# Altium PCB 3.PcbDoc (part 2 of 2)
Units mm, origin at the board's own origin, x right, y up, seen from the top; angles counter-clockwise.
Board outline 213.29 x 128.2 mm, 2 copper layers (Top Layer, Bottom Layer); 207 components, 133 nets, 588 pads, 301 vias.
Unrouted connection lines stored in the file: 3.
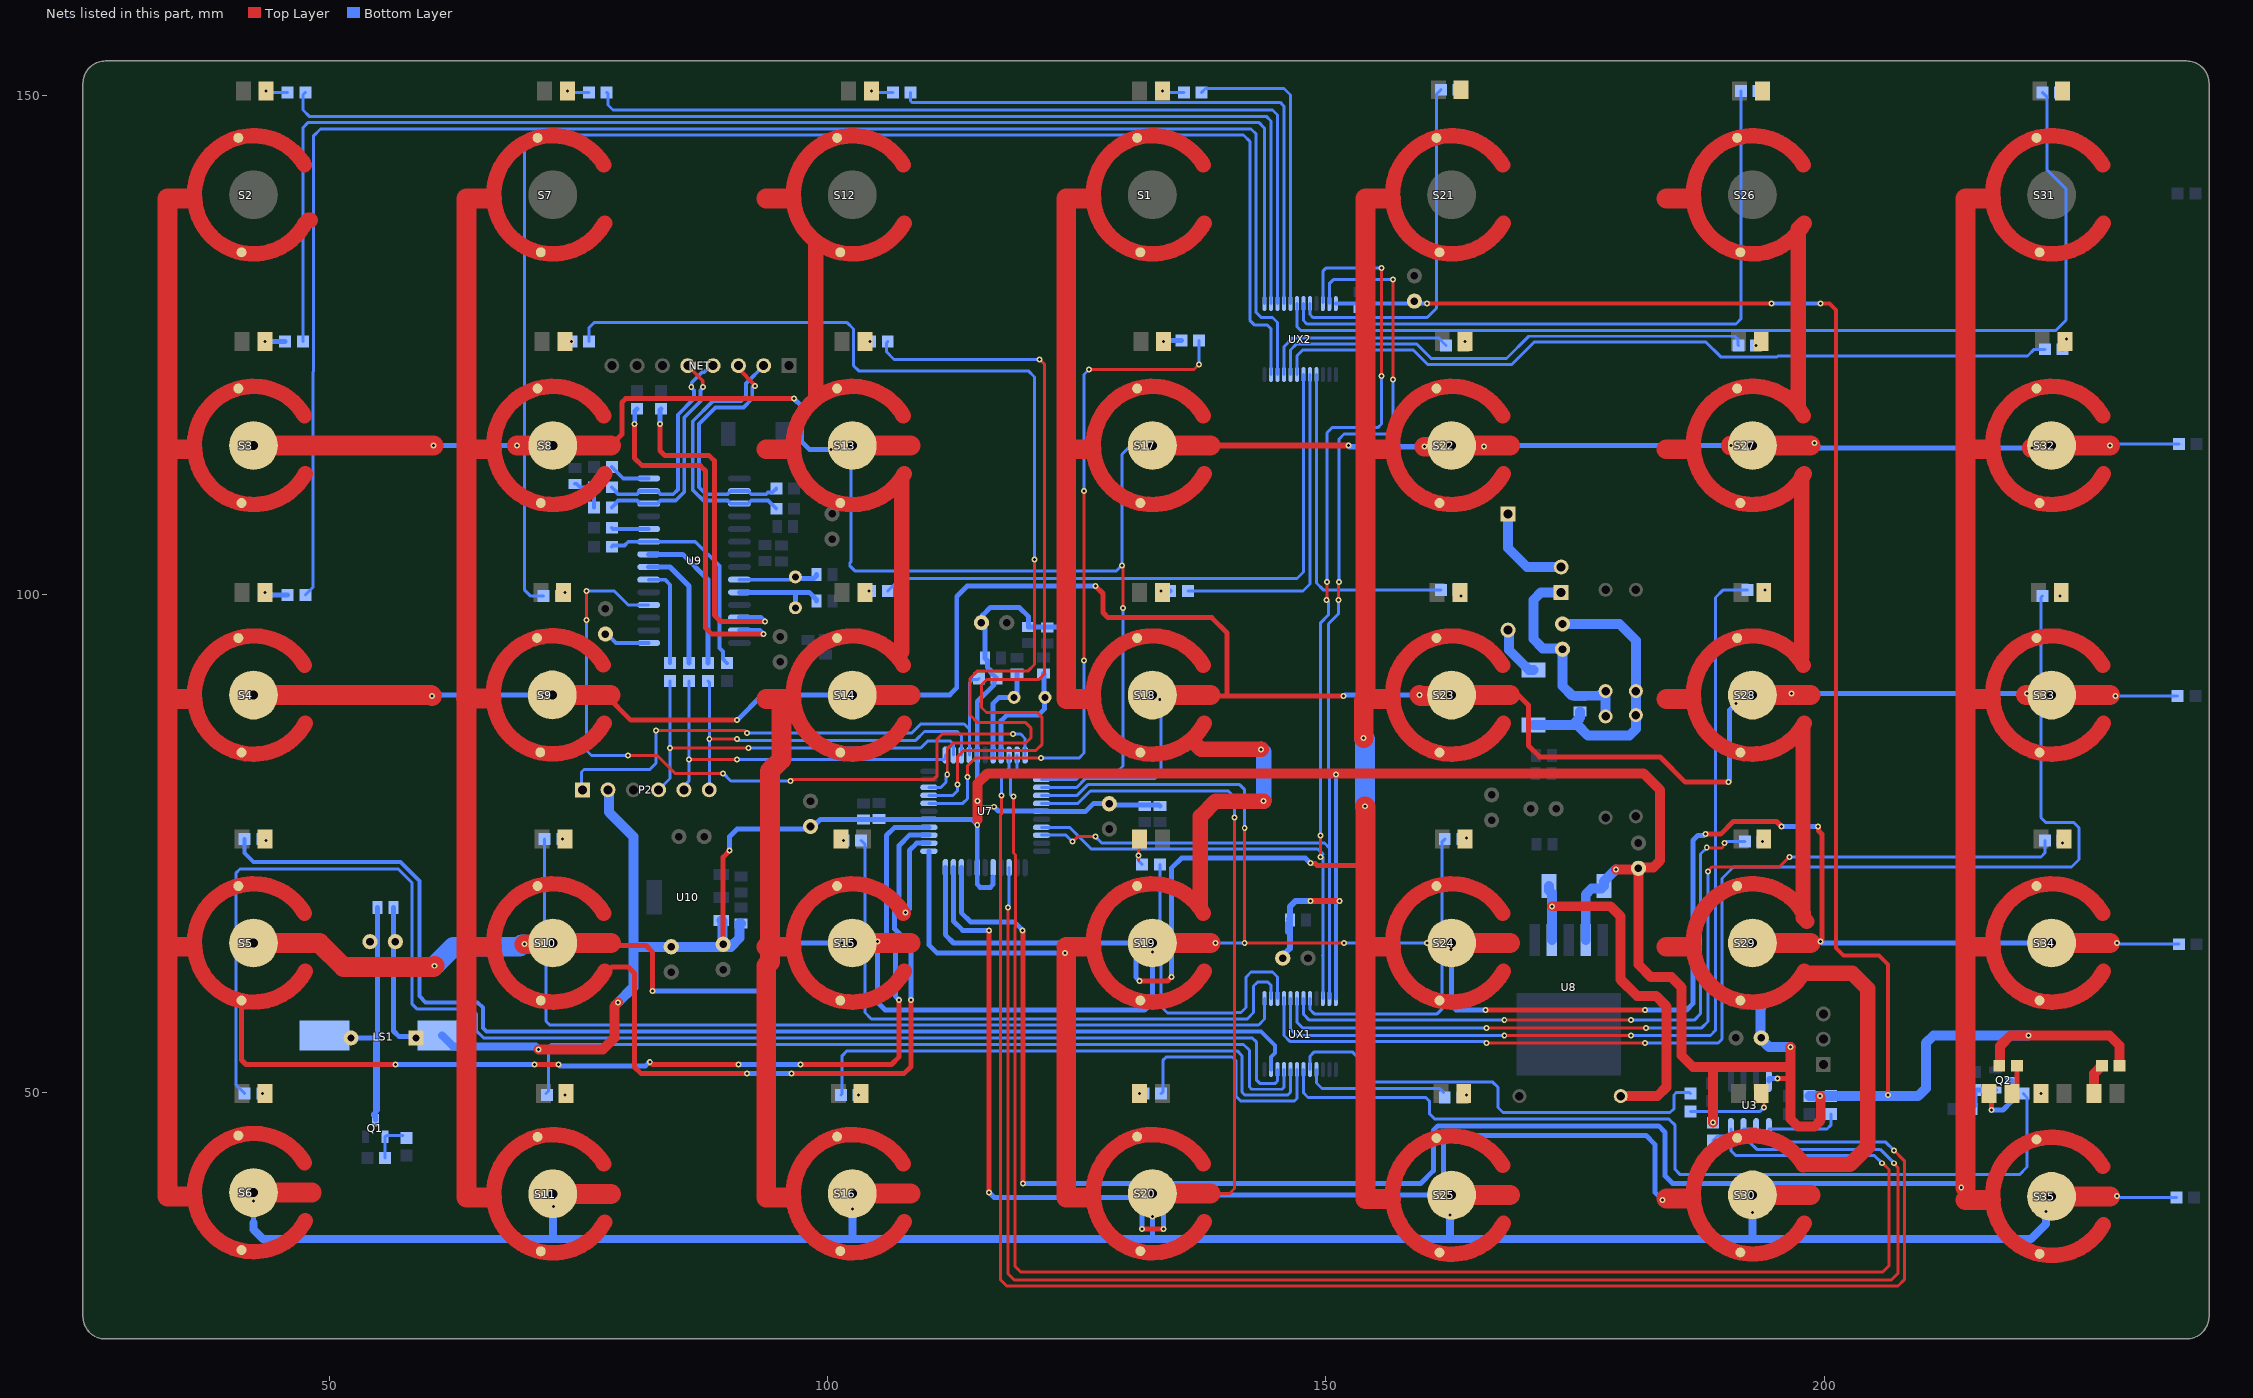
[diagram p2: the nets of this part, all layers, seen from the top]

## Via types
v1: diameter 0.6, hole 0.3, Top Layer to Bottom Layer, 266 vias
v2: diameter 0.9, hole 0.9, Top Layer to Bottom Layer, 35 vias

## Nets (pads, with @x,y where several pads share a name; then routed paths per layer and width w, separated by ;. In a path a pad name is that pad's centre, name@x,y a point inside that pad or via, vN(x,y) a via of type N, cw(c..) or ccw(c..) an arc to the next point about the centre after c; other vN are vias at no path point) (continued)
in2: R2.2 S3.1 S8.1 S13.1 S17.1 S22.1 S27.1 S32.1 U7.13 | length 220.8
  Top Layer w0.3: v1(129.648,98.639) v1@129.648,102.681
  Top Layer w0.5: 78.282,114.935 79.375,116.028 79.375,119.253 79.756,119.634 v1(96.647,119.634)
  Top Layer w0.56: 138.43,114.935 v1(152.273,114.935)
  Top Layer w2: 48.26,114.935 v1(60.452,114.935) ; v1(68.834,114.935) v2(72.44,114.935) ; v1(159.893,114.808) 162.483,114.808 v2(162.61,114.935) ; v1(190.627,114.935) v2(192.786,114.935) ; v1(220.853,114.681) 222.554,114.681 v2(222.808,114.935)
  Bottom Layer w0.3: v1(100.33,114.554) 101.473,114.554 102.362,113.665 102.362,103.251 102.232,103.121 102.232,102.873 102.743,102.362 128.987,102.362 129.495,102.87 v1(129.54,102.87) 129.54,114.046 130.429,114.935 v2(132.588,114.935) ; U7.13@121.474,81.432 124.947,81.432 125.614,82.099 128.962,82.099 129.648,82.785 v1(129.648,98.639) ; v1(228.65,114.935) 228.777,115.062 R2.2@235.585,115.062
  Bottom Layer w0.5: v1(60.452,114.935) v1(68.834,114.935) ; v1(96.647,119.634) 97.409,118.872 97.409,115.316 98.171,114.554 v1(100.33,114.554) ; v1(165.862,114.808) 165.989,114.935 v1(190.627,114.935) ; v1(199.009,115.189) 199.517,114.681 v1(220.853,114.681)
  Bottom Layer w0.56: v1(152.273,114.935) 152.4,114.808 v1(159.893,114.808)
  other v2: 42.418,114.935 102.489,114.935
in3: R3.2 S4.1 S9.1 S14.1 S18.1 S23.1 S28.1 S33.1 U7.14 | length 229.9
  Top Layer w0.5: 77.724,89.916 80.264,87.376 v1(90.932,87.376) ; v1(126.873,100.838) 127.635,100.076 127.635,98.171 128.143,97.663 138.557,97.663 140.081,96.139 140.081,89.789 ; 138.43,89.897 138.538,89.789 140.081,89.789 ; v1(151.765,89.789) 140.081,89.789 ; 168.452,89.897 169.31,89.897 170.307,88.9 170.307,84.836 171.45,83.693 183.515,83.693 186.055,81.153 v1(190.373,81.153) ; v1@220.218,89.916 v1(220.345,90.043)
  Top Layer w2: 45.593,89.897 48.26,89.897 60.217,89.897 v1(60.325,89.789) ; v1(159.385,89.916) 159.512,89.789 162.502,89.789 v2(162.61,89.897) ; v1@220.218,89.916 222.789,89.916 v2(222.808,89.897)
  Bottom Layer w0.3: U7.14@121.474,80.632 124.995,80.632 125.862,81.499 132.807,81.499 133.477,82.169 133.477,89.281 133.188,89.57 133.077,89.57 132.75,89.897 v2(132.588,89.897) ; v1(229.235,89.789) R3.2@235.458,89.789
  Bottom Layer w0.5: v1@60.325,89.897 v1@71.628,89.897 ; v1(90.932,87.376) 93.472,89.916 102.489,89.916 112.268,89.916 112.966,90.614 112.966,99.781 113.878,100.693 ; 113.878,100.711 114.005,100.838 v1(126.873,100.838) ; v1(151.765,89.789) 151.892,89.916 v1(159.385,89.916) ; v1(190.373,81.153) 190.5,81.28 190.5,88.392 192.151,90.043 v1(220.345,90.043)
  other v1: 191.135,89.027 133.333,89.425 71.628,89.916 196.723,90.043
  other v2: 42.418,89.897 102.489,89.897 192.786,89.897 72.39,89.916
in4: R4.2 S5.1 S10.1 S15.1 S19.1 S24.1 S29.1 S34.1 U7.15 | length 261
  Top Layer w0.3: v1(141.859,76.581) v1(141.859,65.024) v1(151.796,65.024)
  Top Layer w0.5: 78.282,65.024 78.536,64.77 81.788,64.77 82.423,64.135 v1(82.423,60.198) ; v1(165.989,58.293) v1(181.991,58.293) ; v1(188.087,75.946) 189.611,75.946 190.881,77.216 195.199,77.216 v1(195.707,76.708) ; 198.628,65.024 199.478,65.024 v1(199.625,65.17) 199.771,65.317 199.771,75.946 199.409,76.308 199.409,76.689 v1(199.39,76.708)
  Top Layer w2: 46.863,65.024 48.26,65.024 49.022,65.024 51.435,62.611 60.452,62.611 v1(60.579,62.738) ; v1(69.596,64.897) 72.313,64.897 v2(72.44,65.024)
  Bottom Layer w0.3: U7.15@121.474,79.832 125.044,79.832 126.111,80.899 141.351,80.899 141.859,80.391 v1(141.859,76.581) ; v1(138.938,65.024) v1(141.859,65.024) ; v1(151.796,65.024) v1(160.147,65.024) ; v1(229.362,65.024) 229.489,64.897 R4.2@235.585,64.897
  Bottom Layer w0.5: v1(82.423,60.198) 93.218,60.198 94.234,61.214 94.234,64.389 94.869,65.024 v2(102.489,65.024) ; v1(105.029,65.151) 105.029,59.055 105.791,58.293 131.826,58.293 132.588,59.055 v2(132.588,65.024) ; v2(162.61,65.024) 162.61,58.751 163.068,58.293 v1(165.989,58.293) ; v1(181.991,58.293) 186.182,58.293 186.817,58.928 186.817,75.311 187.325,75.819 187.933,75.819 188.06,75.946 v1(188.087,75.946) ; v1(195.707,76.708) v1(199.39,76.708) ; v1(199.625,65.17) 199.771,65.024 v2(222.808,65.024)
  Bottom Layer w2: v1(60.579,62.738) 62.484,64.643 69.088,64.643 69.342,64.897 v1(69.596,64.897)
  other v1: 132.588,64.135 162.56,64.389 101.473,65.024 221.234,65.024
  other v2: 42.418,65.024 192.786,65.024
in5: R5.2 S6.1 S11.1 S16.1 S20.1 S25.1 S30.1 S35.1 U7.16 | length 269.8
  Top Layer w0.3: 138.43,39.878 140.335,39.878 140.843,40.386 v1(140.843,77.597)
  Bottom Layer w0.3: U7.16@121.474,79.032 125.133,79.032 126.365,80.264 140.208,80.264 140.843,79.629 v1(140.843,77.597) ; v1(229.362,39.624) 229.489,39.497 R5.2@235.331,39.497
  Bottom Layer w0.5: 42.418,36.957 v2(42.418,39.986) ; 132.588,35.322 v2(132.588,39.878)
  Bottom Layer w0.8: 42.418,36.957 42.418,36.283 43.379,35.322 72.44,35.322 ; v1(72.517,38.608) 72.44,38.531 72.44,35.322 ; v1(102.489,38.354) 102.514,38.329 102.514,35.322 ; v1(162.433,37.719) 162.433,35.322 ; v1(192.786,37.973) 192.786,35.322 ; v1(222.25,38.1) 222.25,36.83 220.742,35.322 192.786,35.322 ; 72.44,35.322 102.514,35.322 ; 102.514,35.322 132.588,35.322 162.433,35.322 ; 162.433,35.322 192.786,35.322
  other v1: 132.588,37.6 42.418,39.116
  other v2: 222.808,39.605 162.61,39.732 192.786,39.751 72.44,39.859 102.489,39.878
INPUT: C16.1 C17.1 D5.2 D6.1 L1.2 | length 29.5
  Bottom Layer w1: L1.2@170.815,86.912 174.799,86.912 ; C16.1@173.736,97.028 179.451,97.028 181.102,95.377 D5.2@181.102,90.297 D6.1@181.102,87.884 181.102,86.487 180.467,85.852 176.276,85.852 175.216,86.912 174.799,86.912 ; C17.1@175.514,88.227 175.514,87.627 174.799,86.912
INPUT2: C16.2 C17.2 D4.2 D7.1 P3.1 | length 21.5
  Bottom Layer w1: P3.1@173.609,100.203 171.577,100.203 170.815,99.441 170.815,95.504 171.731,94.588 173.636,94.588 C16.2@173.736,94.488 173.736,90.805 174.714,89.827 C17.2@175.514,89.827 177.476,89.827 177.946,90.297 D4.2@178.054,90.297 D7.1@178.054,87.757
INT: U7.11 U9.4 | length 74
  Top Layer w0.3: v1(75.819,97.409) v1(75.819,100.33) ; v1(80.01,83.82) 82.931,83.82 84.709,82.042 v1(89.535,82.042) ; v1(96.266,81.28) 96.393,81.407 110.617,81.407 110.998,81.788 110.998,85.471 111.506,85.979 v1(118.618,85.979)
  Bottom Layer w0.3: v1(75.819,97.409) 75.819,84.328 76.327,83.82 v1(80.01,83.82) ; v1(75.819,100.33) 78.613,100.33 80.01,98.933 U9.4@82.064,98.933 ; v1(89.535,82.042) 90.297,81.28 v1(96.266,81.28) ; v1(118.618,85.979) 119.38,85.979 119.824,85.535 U7.11@119.824,83.882
LED1: R20.1 UX2.19 | length 68.8
  Bottom Layer w0.3: UX2.19@147.746,129.171 147.746,127.463 148.082,127.127 191.135,127.127 191.643,127.635 R20.1@191.643,150.495
LED2: R21.1 UX2.18 | length 103.9
  Bottom Layer w0.3: UX2.18@147.096,129.171 147.096,126.843 147.447,126.492 223.242,126.492 224.258,127.508 224.258,140.682 222.319,142.621 222.319,149.918 R21.1@221.869,150.368
LED3: R22.1 UX2.8 | length 49.9
  Bottom Layer w0.3: UX2.8@146.446,122.047 146.446,124.51 147.066,125.13 159.096,125.13 160.563,123.663 168.113,123.663 170.342,125.892 191.008,125.892 191.297,125.603 191.34,125.603 191.34,125.017 R22.1@191.389,124.968
LED4: R23.1 UX2.7 | length 79.6
  Bottom Layer w0.3: UX2.7@147.096,122.047 147.096,123.925 147.701,124.53 158.75,124.53 160.217,123.063 168.656,123.063 170.885,125.292 188.144,125.292 189.611,123.825 195.267,123.825 195.355,123.913 220.384,123.913 221.058,124.587 R23.1@222.123,124.587
LED5: R24.1 UX2.9 | length 19.7
  Bottom Layer w0.3: UX2.9@145.796,122.047 145.796,124.841 146.685,125.73 161.29,125.73 R24.1@162.052,124.968
LED6: R25.1 U7.40 | length 71.9
  Top Layer w0.3: v1(114.046,81.661) 114.046,82.804 114.808,83.566 v1(121.412,83.566) ; v1(125.73,93.345) v1(125.73,110.363) ; v1(126.238,122.555) 136.779,122.555 v1(137.287,123.063)
  Bottom Layer w0.3: U7.40@110.174,79.032 113.576,79.032 114.046,79.502 v1(114.046,81.661) ; v1(121.412,83.566) 125.222,83.566 125.73,84.074 v1(125.73,93.345) ; v1(125.73,110.363) 125.73,122.047 v1(126.238,122.555) ; v1(137.287,123.063) R25.1@137.287,125.476
LED7: R26.1 UX2.17 | length 30.3
  Bottom Layer w0.3: R26.1@137.541,150.368 137.922,150.749 145.796,150.749 146.446,150.099 UX2.17@146.446,129.171
LED8: R27.1 UX2.20 | length 36.4
  Bottom Layer w0.3: UX2.20@148.396,129.171 148.396,128.07 148.692,127.774 160.159,127.774 161.094,128.709 161.094,150.172 R27.1@161.544,150.622
LED9: R28.1 UX1.16 | length 130.6
  Top Layer w0.3: v1(166.116,54.991) v1(181.991,54.991)
  Bottom Layer w0.3: UX1.16@145.796,59.563 UX1.16@145.796,59.448 145.796,55.753 146.431,55.118 165.989,55.118 v1(166.116,54.991) ; v1(181.991,54.991) 189.357,54.991 189.738,55.372 189.738,71.501 190.881,72.644 224.79,72.644 225.552,73.406 225.552,76.581 225.044,77.089 222.25,77.089 221.742,77.597 221.742,99.695 R28.1@221.869,99.822
LED10: R29.1 UX1.17 | length 93.1
  Top Layer w0.3: v1(167.894,55.753) v1(180.594,55.753)
  Bottom Layer w0.3: UX1.17@146.446,59.448 146.446,56.373 147.066,55.753 v1(167.894,55.753) ; v1(180.594,55.753) 188.595,55.753 189.098,56.256 189.098,99.69 189.865,100.457 R29.1@192.278,100.457
LED11: R30.1 UX2.4 | length 33.7
  Bottom Layer w0.3: UX2.4@149.046,122.047 149.046,101.144 149.733,100.457 R30.1@161.544,100.457
LED12: R31.1 UX2.5 | length 33.6
  Bottom Layer w0.3: R31.1@136.144,100.33 147.701,100.33 148.396,101.025 UX2.5@148.396,122.047
LED13: R32.1 UX2.6 | length 62.3
  Bottom Layer w0.3: R32.1@106.045,100.33 107.303,101.588 147.099,101.588 147.746,102.235 UX2.6@147.746,122.047
LED14: R33.1 UX2.13 | length 136
  Bottom Layer w0.3: R33.1@47.371,125.349 47.371,146.812 47.914,147.355 143.256,147.355 143.846,146.765 UX2.13@143.846,129.171
LED15: R34.1 U7.42 | length 112.1
  Top Layer w0.3: v1(112.014,81.915) 112.014,84.498 112.606,85.09 119.888,85.09 120.396,85.598 120.396,86.614 119.888,87.122 115.062,87.122 114.3,87.884 114.3,91.567 115.062,92.329 120.142,92.329 120.777,92.964 v1(120.777,103.505)
  Bottom Layer w0.3: R34.1@76.073,125.349 76.073,126.746 76.581,127.254 101.981,127.254 102.616,126.619 102.616,122.936 103.124,122.428 120.142,122.428 120.777,121.793 v1(120.777,103.505) ; U7.42@110.174,80.632 111.366,80.632 111.887,81.153 111.887,81.788 v1(112.014,81.915)
LED16: R35.1 U7.41 | length 82.3
  Top Layer w0.3: v1(113.03,80.899) 113.03,83.693 113.665,84.328 120.904,84.328 121.539,84.963 121.539,87.63 121.031,88.138 115.951,88.138 115.443,88.646 115.443,90.932 115.951,91.44 121.184,91.44 121.793,92.049 121.793,123.063 v1(121.285,123.571)
  Bottom Layer w0.3: R35.1@106.045,125.349 105.918,125.222 105.918,124.333 106.68,123.571 v1(121.285,123.571) ; U7.41@110.174,79.832 112.598,79.832 113.03,80.264 v1(113.03,80.899)
LED17: R54.2 UX1.18 | length 95
  Top Layer w0.3: v1(166.116,56.515) v1(182.118,56.515) ; v1(188.341,72.206) 188.341,72.263 188.722,72.644 195.478,72.644 v1(196.494,73.66)
  Bottom Layer w0.3: UX1.18@147.096,59.448 147.096,57.069 147.65,56.515 v1(166.116,56.515) ; v1(182.118,56.515) 187.706,56.515 188.341,57.15 v1(188.341,72.206) ; v1(196.494,73.66) 221.742,73.66 222.123,74.041 R54.2@222.123,75.311
LED18: R53.2 UX1.19 | length 62.7
  Top Layer w0.3: v1(167.894,57.277) v1(180.594,57.277) ; v1(188.208,74.599) 188.258,74.549 189.738,74.549 189.847,74.658
  Bottom Layer w0.3: UX1.19@147.746,59.448 147.746,57.867 148.336,57.277 v1(167.894,57.277) ; v1(180.594,57.277) 186.944,57.277 187.591,57.924 187.591,73.943 188.208,74.561 v1(188.208,74.599) ; v1(189.974,75.039) 190.056,75.039 190.2,75.184 R53.2@192.024,75.184
LED19: R52.2 UX1.20 | length 31.9
  Bottom Layer w0.3: UX1.20@148.396,59.448 148.396,58.36 148.844,57.912 161.163,57.912 161.671,58.42 161.671,75.184 R52.2@161.925,75.438
LED20: R51.2 UX1.15 | length 32.4
  Bottom Layer w0.3: R51.2@133.35,72.898 133.35,66.802 133.793,66.359 133.793,63.943 133.477,63.627 133.477,58.639 134.112,58.004 140.716,58.004 140.751,58.039 141.478,58.039 141.986,58.547 141.986,61.595 142.494,62.103 144.653,62.103 145.146,61.61 UX1.15@145.146,59.448
LED21: R50.2 UX1.14 | length 63
  Bottom Layer w0.3: R50.2@103.378,75.311 103.759,74.93 103.759,58.039 104.394,57.404 142.113,57.404 142.748,58.039 142.748,60.706 143.129,61.087 144.193,61.087 144.496,60.784 144.496,60.044 UX1.14@144.496,59.448
LED22: R49.2 UX1.13 | length 93.3
  Bottom Layer w0.3: R49.2@71.628,75.438 71.628,66.675 71.117,66.164 71.117,64.138 71.755,63.5 71.755,57.181 72.136,56.8 143.256,56.8 143.846,57.39 UX1.13@143.846,59.448
LED24: R47.2 UX2.11 | length 145.7
  Bottom Layer w0.3: R47.2@71.501,99.822 70.485,99.822 70.482,99.819 70.234,99.819 69.584,100.469 69.584,145.784 69.885,146.085 141.732,146.085 142.367,145.45 142.367,127.508 142.875,127 144.145,127 144.496,126.649 UX2.11@144.496,122.047
LED25: R46.2 UX1.6 | length 89.5
  Bottom Layer w0.3: UX1.6@147.746,52.324 147.746,49.993 148.209,49.53 150.838,49.53 150.847,49.521 160.029,49.521 160.401,49.149 160.401,47.879 160.909,47.371 184.404,47.371 185.039,46.736 185.039,42.291 185.547,41.783 219.583,41.783 220.345,42.545 220.345,49.53 R46.2@219.964,49.911
LED26: R45.2 UX1.5 | length 46.2
  Bottom Layer w0.3: UX1.5@148.396,52.324 148.396,53.654 148.844,54.102 152.654,54.102 153.289,53.467 153.289,51.562 153.797,51.054 166.751,51.054 167.259,50.546 167.259,48.514 167.767,48.006 184.531,48.006 184.912,48.387 184.912,49.784 185.166,50.038 186.436,50.038 R45.2@186.563,49.911
LED27: R44.2 UX1.4 | length 14.5
  Bottom Layer w0.3: UX1.4@149.046,52.324 149.046,50.979 149.606,50.419 161.417,50.419 R44.2@161.798,50.038
LED28: R43.2 UX1.7 | length 23.9
  Bottom Layer w0.3: R43.2@133.477,49.911 133.64,50.074 133.64,53.249 133.985,53.594 140.589,53.594 140.97,53.213 140.97,49.657 141.478,49.149 146.812,49.149 147.096,49.433 UX1.7@147.096,52.324
LED29: R42.2 UX1.8 | length 55.5
  Bottom Layer w0.3: R42.2@101.346,49.784 101.473,49.911 101.473,53.721 101.951,54.199 141.097,54.199 141.59,53.706 141.59,50.053 141.894,49.749 146.142,49.749 146.446,50.053 UX1.8@146.446,52.324
LED30: R41.2 UX1.9 | length 84.6
  Bottom Layer w0.3: R41.2@71.755,49.911 72.009,50.165 72.009,54.595 72.263,54.849 141.732,54.849 142.332,54.249 142.332,50.581 142.564,50.349 145.603,50.349 145.778,50.525 145.778,51.487 145.796,51.505 UX1.9@145.796,52.324
LED31: R40.2 UX1.10 | length 147.6
  Bottom Layer w0.3: R40.2@41.529,49.911 40.637,50.803 40.637,72.006 41.069,72.438 56.944,72.438 58.293,71.09 58.293,58.928 58.801,58.42 64.262,58.42 64.77,57.912 64.77,56.231 65.502,55.499 142.621,55.499 143.014,55.106 143.014,51.296 143.361,50.949 144.929,50.949 145.146,51.166 UX1.10@145.146,52.324
LED32: R39.2 UX1.11 | length 123.3
  Bottom Layer w0.4: R39.2@41.529,75.438 41.529,74.041 42.418,73.152 57.15,73.152 59.055,71.247 59.055,59.705 59.69,59.07 64.897,59.07 65.42,58.547 65.42,56.5 65.77,56.15 143.494,56.15 144.907,54.737 144.907,53.975 144.496,53.564 UX1.11@144.496,52.324
LED33: R18.1 UX2.15 | length 87.8
  Bottom Layer w0.3: R18.1@77.851,150.368 77.978,150.241 77.978,149.098 78.486,148.59 144.653,148.59 145.146,148.097 UX2.15@145.146,129.171
LED34: R16.1 UX2.14 | length 117.8
  Bottom Layer w0.3: R16.1@47.625,150.368 47.371,150.114 47.371,148.59 48.006,147.955 144.018,147.955 144.496,147.477 UX2.14@144.496,129.171
LED35: R17.1 UX2.16 | length 58.4
  Bottom Layer w0.3: R17.1@108.331,150.368 108.331,149.494 108.507,149.318 140.174,149.318 140.208,149.352 145.161,149.352 145.164,149.355 145.412,149.355 145.796,148.971 UX2.16@145.796,129.171
MISO: P2.4 R58.2 U7.2 | length 41.3
  Top Layer w0.3: v1(84.201,84.582) v1(92.075,84.582)
  Bottom Layer w0.3: P2.4@83.058,80.391 84.201,81.534 v1(84.201,84.582) R58.2@84.201,91.313 ; v1(92.075,84.582) 109.347,84.582 110.045,85.281 112.325,85.281 112.624,84.982 U7.2@112.624,83.882
MOSI: P2.5 R57.2 U7.1 | length 37.2
  Top Layer w0.3: v1(86.106,83.439) v1(90.932,83.439)
  Bottom Layer w0.3: P2.5@85.598,80.391 85.598,80.716 85.98,81.097 85.98,81.154 86.106,81.28 v1(86.106,83.439) R57.2@86.106,91.313 ; v1(90.932,83.439) 111.709,83.439 111.824,83.554 U7.1@111.824,83.882
NetC35_2: C35.2 C36.2 LS1.2 LS1.2A Q1.1 | length 33.1
  Bottom Layer w0.5: LS1.2A@52.197,55.499 54.483,55.499 54.667,55.683 54.667,48.063 ; C36.2@54.102,65.151 54.864,65.151 ; Q1.1@54.667,47.242 Q1.1@54.667,47.517 ; C35.2@54.864,68.58 54.864,65.151 ; Q1.1@54.667,47.517 54.667,48.063 ; Q1.1@54.667,47.517 54.464,47.721 54.464,47.86 54.667,48.063 ; 54.667,48.063 54.864,48.26 54.864,65.151
NetC37_1: C37.1 U9.1 | length 4.7
  Bottom Layer w0.4: C37.1@77.724,96.012 77.872,96.012 78.761,95.123 U9.1@82.064,95.123
NetC44_2: C44.2 R64.1 R65.1 | length 4.1
  Bottom Layer w0.381: C44.2@74.676,111.087 74.826,111.087 75.169,110.744 R65.1@76.581,110.744 R64.1@76.581,108.712
NetD1_1: D1.1 R16.2 | length 2.2
  Bottom Layer w0.3: v1(43.688,150.495) 43.815,150.368 R16.2@45.847,150.368
NetD2_1: D2.1 R17.2 | length 2.2
  Bottom Layer w0.3: v1(104.394,150.495) 104.521,150.368 R17.2@106.553,150.368
NetD3_1: D3.1 R18.2 | length 2.2
  Bottom Layer w0.3: v1(73.914,150.495) 74.041,150.368 R18.2@76.073,150.368
NetD8_1: D8.1 R20.2
NetD9_1: D9.1 R21.2
NetD10_1: D10.1 R22.2 | length 0.7
  Top Layer w0.3: v1(193.167,124.968) 193.548,125.349 D10.1@193.675,125.349
NetD11_1: D11.1 R23.2 | length 1.2
  Bottom Layer w0.5: R23.2@223.901,124.587 224.251,124.937 224.251,125.572 v1(224.282,125.603)
NetD12_1: D12.1 R24.2 | length 0.4
  Bottom Layer w0.5: R24.2@163.83,124.968 163.957,125.095 v1(163.957,125.349)
NetD13_1: D13.1 R25.2 | length 1.8
  Bottom Layer w0.5: v1(133.731,125.349) 133.858,125.476 R25.2@135.509,125.476
NetD14_1: D14.1 R26.2 | length 2.2
  Bottom Layer w0.3: v1(133.604,150.495) 133.731,150.368 R26.2@135.763,150.368
NetD15_1: D15.1 R27.2
NetD16_1: D16.1 R28.2 | length 0.4
  Top Layer w0.5: v1(223.647,99.822) 223.774,99.949 D16.1@223.774,100.203
NetD17_1: D17.1 R29.2 | length 0.3
  Top Layer w0.5: D17.1@193.929,100.203 193.929,100.33 v1(194.056,100.457)
NetD18_1: D18.1 R30.2 | length 0.7
  Bottom Layer w0.5: R30.2@163.322,100.457 163.576,100.203 v1(163.576,99.822)
NetD19_1: D19.1 R31.2 | length 0.9
  Bottom Layer w0.5: v1(133.477,100.33) R31.2@134.366,100.33
NetD20_1: D20.1 R32.2 | length 0.1
  Bottom Layer w0.5: v1(104.14,100.33) R32.2@104.267,100.33
NetD21_1: D21.1 R33.2 | length 2
  Bottom Layer w0.5: v1(43.561,125.349) R33.2@45.593,125.349
NetD22_1: D22.1 R34.2 | length 0.6
  Top Layer w0.5: D22.1@73.66,125.349 v1(74.295,125.349)
NetD23_1: D23.1 R35.2 | length 0.5
  Top Layer w0.5: D23.1@103.759,125.349 v1(104.267,125.349)
NetD24_2: D24.2 L2.1 U8.2 | length 38
  Top Layer w1: v1(172.671,68.707) 178.562,68.707 179.578,67.691 179.578,61.341 181.229,59.69 183.134,59.69 184.15,58.674 184.15,50.546 183.261,49.657 D24.2@179.578,49.657
  Bottom Layer w1: L2.1@172.383,70.739 172.383,70.289 172.671,70.001 v1(172.671,68.707) U8.2@172.671,65.33
NetD25_1: D25.1 R36.2 | length 3.1
  Top Layer w1: D25.1@227.076,49.911 227.076,51.943 R36.2@227.838,52.705
NetD26_2: D26.2 R39.1 | length 0.2
  Top Layer w0.3: D26.2@43.561,75.438 v1(43.688,75.311)
NetD27_2: D27.2 R40.1 | length 0.4
  Top Layer w0.3: D27.2@43.307,49.657 D27.2@43.561,49.911
  other v1: 43.307,49.911
NetD28_2: D28.2 R41.1
  other v1: 73.66,49.784
NetD29_2: D29.2 R42.1
  other v1: 103.124,49.784
NetD30_2: D30.2 R43.1 | length 0.4
  Bottom Layer w0.3: v1(131.318,49.911) R43.1@131.699,49.911
NetD31_2: D31.2 R44.1 | length 0.5
  Bottom Layer w0.3: R44.1@163.703,49.53 163.83,49.53 v1(164.084,49.784)
NetD32_2: D32.2 R45.1 | length 9.1
  Top Layer w0.3: D32.2@193.675,49.911 193.929,49.657 v1(193.929,48.514)
  Bottom Layer w0.3: R45.1@186.563,48.133 187.902,48.133 187.936,48.099 193.514,48.099 v1(193.929,48.514)
NetD33_2: D33.2 R46.1
  other v1: 221.742,49.911
NetD34_2: D34.2 R47.1 | length 0.1
  Top Layer w0.5: D34.2@73.533,100.203 v1(73.66,100.203)
NetD35_2: D35.2 R48.1 | length 2.4
  Bottom Layer w0.5: v1(43.561,100.203) 43.815,99.949 R48.1@45.847,99.949
NetD36_2: D36.2 R49.1 | length 0.7
  Bottom Layer w0.5: v1(73.406,75.438) 73.756,75.088 73.756,74.961 R49.1@73.787,74.93
NetD37_2: D37.2 R50.1
  other v1: 101.6,75.311
NetD38_2: D38.2 R51.1 | length 2.2
  Top Layer w0.3: 131.191,73.279 131.191,74.295 131.318,74.422
  Bottom Layer w0.3: v1(131.191,73.787) 131.191,73.279 R51.1@131.572,72.898
NetD39_2: D39.2 R52.1 | length 0.4
  Bottom Layer w0.5: R52.1@163.703,75.438 163.83,75.565 v1(164.084,75.565)
NetD40_2: D40.2 R53.1 | length 0.3
  Bottom Layer w0.5: v1(193.802,75.184) 193.802,75.311 R53.1@193.929,75.438
NetD41_2: D41.2 R54.1 | length 0.3
  Bottom Layer w0.5: v1(223.901,75.057) R54.1@223.901,75.311
NetD42_1: D42.1 R70.1 | length 3
  Top Layer w0.5: D42.1@218.821,49.911 219.321,50.411 219.321,51.347 219.329,51.355 R70.1@219.329,52.705
NetD42_2: D42.2 Q2.1 | length 6.3
  Top Layer w0.5: D42.2@216.535,49.911 216.789,49.657 v1(216.789,48.26)
  Bottom Layer w0.5: v1(216.789,48.26) 217.932,48.26 218.814,49.142 218.814,51.246 Q2.1@218.819,51.251
NetF1_1: F1.1 P3.2 | length 9.5
  Bottom Layer w1: F1.1@168.275,108.06 168.275,104.648 170.18,102.743 P3.2@173.609,102.743
NetF1_2: F1.2 L1.1 | length 5.3
  Bottom Layer w1: F1.2@168.275,96.41 168.371,96.314 168.371,94.406 170.365,92.412 L1.1@170.815,92.412
NetQ1_2: Q1.2 R37.2 R38.2 | length 4
  Bottom Layer w0.3: R38.2@55.626,43.434 Q1.2@55.626,45.593 55.753,45.72 R37.2@57.404,45.72
NetQ2_2: Q2.2 R68.2 R69.2 | length 4.1
  Bottom Layer w0.5: R68.2@214.757,48.387 215.138,48.768 R69.2@215.138,50.292 Q2.2@217.17,50.292
NetR55_1: R55.1 R56.1 U9.9 | length 22.1
  Bottom Layer w0.381: R56.1@78.359,104.775 78.486,104.902 79.629,104.902 80.01,105.283 U9.9@82.064,105.283 86.741,105.283 89.154,102.87 89.154,94.615 89.506,94.263 89.506,93.501 R55.1@89.916,93.091
NetR57_1: R57.1 U9.7 | length 12.6
  Bottom Layer w0.5: U9.7@82.064,102.743 84.201,102.743 86.106,100.838 R57.1@86.106,93.091
NetR58_1: R58.1 U9.6 | length 10.2
  Bottom Layer w0.381: U9.6@82.064,101.473 83.693,101.473 84.201,100.965 R58.1@84.201,93.091
NetR59_1: R59.1 U9.8 | length 15.4
  Bottom Layer w0.5: U9.8@82.064,104.013 85.471,104.013 88.011,101.473 R59.1@88.011,93.091
NetR60_1: R60.1 U9.14 | length 4.2
  Bottom Layer w0.381: R60.1@78.359,112.776 79.502,111.633 U9.14@82.064,111.633
NetR61_1: R61.1 U9.10 | length 3.8
  Bottom Layer w0.381: R61.1@78.359,106.68 78.486,106.553 U9.10@82.064,106.553
NetR62_2: R62.2 U9.27 | length 37.1
  Top Layer w0.5: v1(80.645,117.094) 80.645,113.665 81.407,112.903 87.249,112.903 87.757,112.395 87.757,96.647 88.392,96.012 v1(93.599,96.012)
  Bottom Layer w0.5: v1(80.645,117.094) 80.664,117.113 80.664,118.383 R62.2@80.899,118.618 ; U9.27@91.164,96.393 93.218,96.393 v1(93.599,96.012)
NetR63_2: R63.2 U9.26 | length 33.7
  Top Layer w0.5: v1(83.185,117.094) 83.185,114.427 83.693,113.919 88.138,113.919 88.646,113.411 88.646,97.917 89.281,97.282 v1(93.726,97.282)
  Bottom Layer w0.5: v1(83.185,117.094) 83.204,117.113 83.204,118.51 R63.2@83.312,118.618 ; U9.26@91.164,97.663 93.345,97.663 v1(93.726,97.282)
re: U3.2 U3.3 U7.25 | length 159.8
  Top Layer w0.3: v1(118.11,68.58) 118.11,31.842 118.745,31.207 206.721,31.207 207.391,31.877 207.391,42.464 207.01,42.845 v1(207.01,42.926)
  Bottom Layer w0.3: v1(118.11,68.58) v1@118.11,68.741 ; v1@118.152,68.741 118.224,68.813 U7.25@118.224,72.582 ; U3.3@191.897,46.368 192.532,46.368 ; U3.2@193.167,46.368 192.532,46.368 ; v1(207.01,42.926) 205.613,44.323 193.227,44.323 192.532,45.018 192.532,46.368
RESET: P2.1 R19.2 U7.4 | length 53.5
  Top Layer w0.3: v1(82.804,86.36) 91.661,86.36 v1@91.796,86.224 ; v1@91.796,86.163 91.891,86.163 v1(91.948,86.106)
  Bottom Layer w0.3: P2.1@75.438,80.391 75.311,80.518 75.311,82.169 75.565,82.423 82.169,82.423 82.804,83.058 v1(82.804,86.36) ; v1(91.948,86.106) 91.983,86.071 108.423,86.071 109.347,86.995 113.716,86.995 114.224,86.487 ; U7.4@114.224,83.882 114.224,86.487 ; R19.2@115.189,91.567 115.062,91.44 114.554,91.44 114.224,91.11 114.224,86.487
rx: R8.1 U3.1 U7.9 | length 179
  Top Layer w0.3: v1(117.475,79.842) 117.475,77.978 117.36,77.863 117.36,31.23 117.983,30.607 207.391,30.607 208.026,31.242 208.026,43.18 v1(207.01,44.196)
  Bottom Layer w0.3: v1(117.475,79.842) 117.475,81.748 118.224,82.497 U7.9@118.224,83.882 ; R8.1@200.66,47.879 200.66,46.736 200.279,46.355 194.45,46.355 U3.1@194.437,46.368 194.437,45.568 194.967,45.038 206.168,45.038 v1(207.01,44.196)
SCK: P2.6 R59.2 U7.3 | length 38.8
  Top Layer w0.3: v1(88.138,85.471) v1(90.93,85.471)
  Bottom Layer w0.3: R59.2@88.011,91.313 88.138,91.186 v1(88.138,85.471) P2.6@88.138,80.391 ; v1(90.93,85.471) 90.987,85.414 v1@91.111,85.414 ; v1@91.111,85.347 91.12,85.356 108.851,85.356 109.728,86.233 113.03,86.233 113.424,85.839 U7.3@113.424,83.882
SCL: U7.19 UX1.22 UX2.22 | length 117.4
  Top Layer w0.3: v1@149.48,73.662 v1(149.479,75.819) ; v1(150.057,99.441) 150.114,99.498 v1(150.114,101.219) ; v1(155.575,121.904) v1(155.575,132.715)
  Bottom Layer w0.3: U7.19@121.474,76.632 124.282,76.632 126.457,74.457 149.19,74.457 149.733,73.914 ; v1(149.479,75.819) 149.479,97.155 150.241,97.917 v1@150.241,99.265 ; 149.653,63.788 149.696,63.745 UX1.22@149.696,59.448 ; UX2.22@149.696,129.286 149.696,130.011 149.733,130.048 149.733,132.461 149.987,132.715 v1(155.575,132.715) ; 149.733,63.259 v1@149.733,73.66 ; v1(150.114,101.219) 150.114,116.205 150.622,116.713 155.194,116.713 155.575,117.094 v1(155.575,121.904)
  other v1: 149.481,73.661
SDA: U7.20 UX1.23 UX2.23 | length 115.8
  Top Layer w0.3: v1(124.587,75.184) 125.095,75.692 v1(126.873,75.692) ; v1(151.257,99.441) 151.285,99.469 151.285,101.191 v1(151.314,101.219) ; v1(156.718,121.539) 156.743,121.564 156.743,131.547 v1(156.718,131.572)
  Bottom Layer w0.3: U7.20@121.474,75.832 123.939,75.832 v1(124.587,75.184) ; v1(126.873,75.692) 127.508,75.057 149.86,75.057 150.346,74.571 ; UX1.23@150.346,59.448 150.346,74.571 ; UX2.23@150.346,129.171 150.346,131.169 150.749,131.572 v1(156.718,131.572) ; v1(151.257,99.441) 151.257,98.044 150.253,97.04 150.253,81.604 150.346,81.511 150.346,74.571 ; v1(151.314,101.219) 151.314,115.57 151.822,116.078 156.21,116.078 156.718,116.586 v1(156.718,121.539)
TPI_N: NET.5 R64.2 U9.12 | length 22.3
  Top Layer w0.381: NET.5@85.979,122.936 87.49,121.425 87.49,120.819 v1(87.531,120.777)
  Bottom Layer w0.381: R64.2@78.359,108.712 78.769,109.122 78.769,109.187 78.992,109.41 80.881,109.41 81.199,109.093 U9.12@82.064,109.093 82.929,109.093 83.247,109.41 84.782,109.41 85.626,110.255 85.626,117.748 87.249,119.371 87.249,120.435 87.531,120.718 v1(87.531,120.777)
TPI_P: NET.4 R65.2 U9.13 | length 21.8
  Bottom Layer w0.381: R65.2@78.359,110.744 78.769,110.334 78.769,110.269 78.992,110.045 80.881,110.045 81.199,110.363 U9.13@82.064,110.363 82.929,110.363 83.247,110.045 84.519,110.045 84.991,110.518 84.991,118.011 86.614,119.634 86.614,120.435 86.332,120.718 v1(86.332,120.777) 86.373,120.819 86.373,121.237 87.438,122.301 87.63,122.301 88.265,122.936 NET.4@88.519,122.936
TPO_N: NET.3 R66.2 U9.16 | length 25.5
  Top Layer w0.381: NET.3@91.059,122.936 91.059,122.643 92.738,120.963 v1(92.738,120.904)
  Bottom Layer w0.381: v1(92.738,120.904) 92.697,120.862 92.497,120.862 92.456,120.821 92.456,119.625 91.576,118.745 88.773,118.745 87.122,117.094 87.122,110.744 87.82,110.045 89.981,110.045 90.299,110.363 U9.16@91.164,110.363 92.029,110.363 92.347,110.045 93.853,110.045 94.015,110.207 94.459,110.207 R66.2@94.869,110.617
TPO_P: NET.2 R67.2 U9.17 | length 26.5
  Bottom Layer w0.381: NET.2@93.599,122.936 91.821,121.158 91.821,119.888 91.313,119.38 88.51,119.38 86.487,117.357 86.487,110.481 86.673,110.295 87.557,109.41 89.981,109.41 90.299,109.093 U9.17@91.164,109.093 92.029,109.093 92.347,109.41 94.043,109.41 R67.2@94.869,108.585
tx: R9.2 U3.4 U7.10 | length 170.2
  Top Layer w0.3: v1(118.667,79.708) 118.667,74.044 118.86,73.852 118.86,66.638 118.827,66.605 118.827,32.557 119.38,32.004 205.867,32.004 206.502,32.639 206.502,42.291 205.867,42.926 v1(205.81,42.926)
  Bottom Layer w0.3: 118.364,79.883 118.364,81.788 119.024,82.448 U7.10@119.024,83.882 ; R9.2@188.849,45.212 189.299,45.662 190.488,45.662 U3.4@190.627,45.801 ; U3.4@190.627,46.368 U3.4@190.627,45.801 ; v1(205.81,42.926) 205.048,43.688 191.135,43.688 190.627,44.196 U3.4@190.627,45.801
v1: S2.2 S3.2 S4.2 S5.2 S6.2 U7.37 | length 200.8
  Top Layer w0.5: S5.2@41.256,59.212 41.212,59.169 41.212,53.276 41.656,52.832 v1(56.642,52.832) ; v1(70.612,52.832) v1(73.025,52.832) ; v1(82.169,53.086) 82.423,52.832 v1(91.059,52.832) ; v1(97.282,52.832) 106.426,52.832 107.188,53.594 v1(107.188,59.309)
  Top Layer w1.545: 47.621,137.243 47.919,137.541 48.133,137.541
  Top Layer w2: 33.782,39.605 33.782,64.643 33.782,89.516 33.782,114.554 33.782,139.7
  Bottom Layer w0.5: v1(56.642,52.832) v1(70.612,52.832) ; v1(73.025,52.832) 73.152,52.705 81.761,52.705 82.142,53.086 v1(82.169,53.086) ; v1(91.059,52.832) v1(97.282,52.832) ; v1(107.188,59.309) 106.807,59.69 106.807,64.77 105.918,65.659 105.918,75.819 106.731,76.632 U7.37@110.174,76.632
v2: S7.2 S8.2 S9.2 S10.2 S11.2 U7.36 | length 167.6
  Top Layer w0.5: 77.851,62.103 78.359,62.611 80.01,62.611 80.645,61.976 80.645,52.578 81.28,51.943 v1(91.948,51.943) ; v1(96.393,51.943) 107.696,51.943 108.388,52.635 v1(108.388,59.309)
  Top Layer w2: 63.804,39.478 63.804,64.643 63.804,89.535 63.804,114.554 63.804,139.7
  Bottom Layer w0.5: v1(91.948,51.943) v1(96.393,51.943) ; v1(108.388,59.309) 108.388,64.77 106.718,66.44 106.718,69.253 107.188,69.723 107.188,74.803 108.217,75.832 U7.36@110.174,75.832
v3: S12.2 S13.2 S14.2 S15.2 S16.2 U7.35 | length 92.7
  Top Layer w1.545: 98.44,135.753 98.806,135.387 98.806,119.761 ; 107.282,111.449 107.442,111.289 107.442,94.234
  Top Layer w2: 93.853,39.497 93.853,62.738 94.234,63.119 94.234,64.643 94.234,82.296 95.377,83.439 95.377,89.516
  Bottom Layer w0.5: v1(107.823,68.072) 108.204,68.453 108.204,74.295 108.941,75.032 U7.35@110.174,75.032
v4: S1.2 S17.2 S18.2 S19.2 S20.2 U7.34 | length 126.6
  Top Layer w1.545: 136.491,85.437 137.473,84.455 v1(143.51,84.455) ; 137.414,68.961 137.414,77.724 138.938,79.248 v1(143.764,79.248)
  Top Layer w2: 123.952,39.497 v1@123.952,64.008 ; 123.952,89.516 123.952,114.554 123.952,139.7
  Bottom Layer w0.5: U7.34@110.174,74.232 110.174,64.832 110.998,64.008 v1(123.825,64.008)
  Bottom Layer w1.545: v1(143.51,84.455) 143.764,84.201 v1(143.764,79.248)
v5: S21.2 S22.2 S23.2 S24.2 S25.2 U7.33 | length 164.9
  Top Layer w0.5: v1(131.318,61.214) 134.112,61.214 v1(134.493,61.595) ; v1(148.463,73.025) 148.482,73.006 148.934,73.006 149.129,72.811 153.887,72.811 153.974,72.898
  Top Layer w2: v1(153.797,85.598) 153.797,89.339 153.974,89.516 153.974,114.554 153.974,139.7 ; v1(153.924,78.74) 153.974,78.69 153.974,72.898 153.974,64.643 153.974,39.351
  Bottom Layer w0.5: U7.33@111.824,72.582 111.824,65.849 112.649,65.024 130.556,65.024 130.937,64.643 130.937,61.595 v1(131.318,61.214) ; v1(134.493,61.595) 134.5,61.602 134.5,72.524 135.509,73.533 147.955,73.533 v1(148.463,73.025)
  Bottom Layer w2: v1(153.797,85.598) 153.924,85.471 v1(153.924,78.74)
v6: S26.2 S27.2 S28.2 S29.2 S30.2 U7.32 | length 206.2
  Top Layer w0.5: v1(116.205,40.005) v1(116.205,66.294) ; v1(131.572,36.322) v1(133.731,36.322)
  Top Layer w1.545: 197.39,118.668 197.39,136.348 197.39,136.666 197.969,137.246 ; 197.739,93.726 197.739,111.68 197.739,111.847 197.989,112.097 ; 197.866,86.36 197.866,68.077 197.866,67.564 198.247,67.183 ; 197.901,42.745 197.955,42.799 202.565,42.799 204.343,44.577 204.343,60.452 202.819,61.976 198.199,61.976 197.989,62.186
  Bottom Layer w0.5: U7.32@112.624,72.582 112.624,67.234 113.564,66.294 v1(116.205,66.294) ; v1(116.205,40.005) 116.713,39.497 130.937,39.497 131.572,38.862 v1(131.572,36.322) ; v1(133.731,36.322) 133.731,38.989 134.493,39.751 160.401,39.751 161.798,41.148 161.798,44.958 162.56,45.72 182.118,45.72 183.007,44.831 183.007,40.005 v1(183.769,39.243)
v7: S31.2 S32.2 S33.2 S34.2 S35.2 U7.31 | length 240
  Top Layer w0.5: v1(119.577,66.294) 119.577,66.267 119.634,66.21 v1(119.634,40.894)
  Top Layer w2: 214.172,40.513 214.172,64.643 214.172,89.516 214.172,114.554 214.172,139.7
  Bottom Layer w0.5: U7.31@113.424,72.582 113.424,68.059 114.339,67.144 118.727,67.144 v1(119.577,66.294) ; v1(119.634,40.894) 159.512,40.894 160.782,42.164 160.782,46.228 161.225,46.671 183.388,46.671 184.023,46.036 184.023,41.656 184.785,40.894 195.326,40.894 213.36,40.894 v1(213.741,40.513)
VCC: C3.1 C5.1 C13.1 C14.2 C15.2 C18.2 C19.2 C20.2 C21.2 C25.1 C26.1 C27.1 C32.1 C33.1 C34.1 C35.1 C36.1 C48.1 C49.1 Cx1.1 Cx2.2 Cx3.1 Cx4.2 L2.2 LS1.1 LS1.1A P2.2 R8.2 R9.1 R12.2 R19.1 R36.1 R70.2 U3.8 U7.5 U7.17 U7.27 U7.29 U7.38 U8.4 U10.3 UX1.24 UX2.24 | length 538.2
  Top Layer w0.4: v1(160.147,129.159) v1(194.691,129.159) ; v1(199.644,129.159) 200.533,129.159 201.168,128.524 201.168,64.516 201.93,63.754 205.486,63.754 206.375,62.865 v1(206.375,49.784)
  Top Layer w0.5: C48.1@89.535,64.897 89.535,73.633 90.17,74.268 v1(90.17,74.295) ; v1(115.024,76.873) 115.027,76.876 115.027,77.343 ; 115.049,78.613 116.622,78.613 v1(116.699,78.69) ; v1(195.326,51.435) 196.469,51.435 196.596,51.308
  Top Layer w0.6: v1(148.463,69.215) v1(151.384,69.215)
  Top Layer w1: v1(70.993,54.356) 77.47,54.356 78.613,55.499 78.613,58.674 v1(78.994,59.055) ; 115.027,77.343 115.027,79.265 v1(115.029,79.268) ; 115.049,78.613 115.049,81.013 116.078,82.042 181.864,82.042 183.515,80.391 183.515,73.279 182.853,72.617 181.456,72.617 C34.1@181.356,72.517 ; v1(179.111,72.417) 181.256,72.417 C34.1@181.356,72.517 ; v1(188.849,46.99) 188.849,52.578 ; v1(196.596,54.61) 196.596,52.578 ; v1(199.581,49.657) 199.644,49.593 199.644,47.244 199.009,46.609 197.358,46.609 196.596,47.371 196.596,51.308 196.596,52.578 ; R70.2@217.551,52.705 217.651,52.805 217.651,54.71 218.694,55.753 v1(220.472,55.753) 228.6,55.753 229.616,54.737 R36.1@229.616,52.705 ; C34.1@181.356,72.517 181.356,62.865 182.626,61.595 184.658,61.595 185.674,60.579 185.674,53.721 186.817,52.578 188.849,52.578 ; 188.849,52.578 196.596,52.578
  Bottom Layer w0.4: UX1.24@150.996,59.448 150.996,81.908 v1(151.003,81.915) ; UX2.24@150.996,129.171 159.627,129.171 159.639,129.159 v1(160.147,129.159) ; v1(194.691,129.159) v1(199.644,129.159)
  Bottom Layer w0.5: C35.1@56.464,68.58 56.464,56.185 57.023,55.626 58.57,55.626 LS1.1A@58.697,55.499 ; v1(90.17,74.295) 90.17,75.692 90.932,76.454 98.321,76.454 99.299,77.432 C20.2@103.632,77.432 U7.38@110.174,77.432 114.465,77.432 v1(115.024,76.873) U7.29@115.024,72.582 115.024,70.905 115.317,70.612 116.332,70.612 116.586,70.866 116.586,71.628 ; v1(115.029,79.268) 115.024,79.273 U7.5@115.024,83.882 115.024,89.243 116.713,90.932 116.713,91.313 R19.1@116.967,91.567 116.339,92.195 116.339,92.395 116.036,92.698 116.036,93.349 C14.2@115.786,93.599 115.786,96.535 115.443,96.878 C13.1@115.443,97.155 115.57,97.282 115.57,97.917 116.332,98.679 119.253,98.679 120.142,97.79 C32.1@120.142,96.723 120.161,96.704 123.933,96.704 C33.1@123.952,96.685 ; v1(116.699,78.69) 117.132,78.257 121.449,78.257 U7.17@121.474,78.232 125.909,78.232 126.671,78.994 C26.1@128.27,78.994 128.378,78.886 133.242,78.886 C18.2@133.35,78.778 ; U3.8@194.437,51.168 194.437,51.389 194.483,51.435 v1(195.326,51.435)
  Bottom Layer w0.6: Cx1.1@145.669,63.5 145.669,63.75 146.393,64.474 Cx2.2@146.393,67.31 146.393,68.669 146.939,69.215 v1(148.463,69.215) ; 146.193,66.111 146.193,66.96 Cx2.2@146.289,67.056 ; Cx2.2@146.285,67.418 Cx2.2@146.304,67.437 ; v1@151.096,69.215 v1(151.384,69.215)
  Bottom Layer w0.8: LS1.1@61.347,55.739 62.447,54.639 70.71,54.639 v1(70.993,54.356)
  Bottom Layer w1: P2.2@77.978,80.391 78.069,80.3 78.069,78.141 80.518,75.692 80.518,64.516 ; v1(78.994,59.055) 80.518,60.579 80.518,64.516 ; U10.3@89.354,67.296 89.395,67.296 89.444,67.246 89.444,64.988 C48.1@89.535,64.897 ; C49.1@91.313,66.98 91.163,66.98 91.163,65.509 90.297,64.643 C27.1@84.328,64.643 80.645,64.643 80.518,64.516 ; U8.4@176.071,65.33 176.071,69.899 176.657,70.485 177.633,70.485 177.883,70.735 L2.2@177.883,70.739 177.883,71.189 v1(179.111,72.417) ; C5.1@193.586,58.928 193.586,55.461 194.437,54.61 v1(196.596,54.61) ; R12.2@198.501,49.657 v1(199.581,49.657) R8.2@200.66,49.657 209.423,49.657 210.185,50.419 210.185,54.991 210.947,55.753 v1(220.472,55.753)
X1: C23.2 U7.7 Y1.2 | length 10
  Bottom Layer w0.5: U7.7@116.624,83.882 116.624,89.065 117.221,89.662 Y1.2@118.719,89.662 118.719,89.878 118.999,90.158 C23.2@118.999,92.037
X2: C22.2 U7.8 Y1.1 | length 11.9
  Bottom Layer w0.5: U7.8@117.424,83.882 117.424,87.325 117.983,87.884 121.158,87.884 121.793,88.519 121.793,89.636 Y1.1@121.819,89.662 121.742,89.738 121.742,91.999 C22.2@121.666,92.075
XE1: C46.2 U9.23 Y2.2 | length 8.1
  Bottom Layer w0.381: U9.23@91.164,101.473 96.245,101.473 96.525,101.753 Y2.2@96.774,101.753
  Bottom Layer w0.5: Y2.2@96.774,101.753 96.927,101.6 98.645,101.6 98.895,101.85 C46.2@98.895,101.981
XE2: C47.2 U9.24 Y2.1 | length 9.7
  Bottom Layer w0.5: U9.24@91.164,100.203 96.774,100.203 ; Y2.1@96.774,98.653 96.774,100.203 ; C47.2@98.895,99.314 98.895,99.464 98.156,100.203 96.774,100.203
"": R48.2 UX2.10 | length 167.1
  Bottom Layer w0.3: R48.2@47.625,99.949 48.387,100.711 48.387,122.301 48.421,122.335 48.421,145.957 49.149,146.685 142.494,146.685 143.002,146.177 143.002,128.27 143.51,127.762 144.653,127.762 145.146,127.269 UX2.10@145.146,122.047
pads on no net: U7.21 U7.22 U7.23 U7.26 U7.43 U8.6 U9.3 U9.5 UX1.1 UX2.1
copper on no net: | length 5.4
  Bottom Layer w0.7: 174.371,55.88 178.171,59.68

## Polygon pours and split planes (outlines as drawn)
GND on Top Layer "GND_L01_P004" (solid, pour order 4): 25.654,151.511 27.559,153.416 236.347,153.416 238.252,151.511 238.252,27.305 236.474,25.527 28.448,25.527 25.654,28.321
GND on Top Layer "GND_L01_P002" (solid, pour order 2): 26.543,150.876 26.543,151.765 27.686,151.765 26.543,150.622 26.543,150.241 25.908,150.241
GND on Top Layer "GND_L01_P001" (solid, pour order 1): 25.781,150.114 25.781,150.876 28.067,153.162 28.829,153.162 28.956,153.289
GND on Bottom Layer "GND_L02_P003" (solid, pour order 3): 25.654,151.511 27.552,153.409 236.227,153.409 238.252,151.384 238.252,27.305 236.474,25.527 28.448,25.527 25.654,28.321

## Silkscreen, mask and mechanical layers (free items; w line width, h text height)
Mechanical 1:
  lines w0.2: 30.106,153.409 236.354,153.409 cw(c236.354,151.264) 238.499,151.264 238.499,27.552 cw(c236.354,27.552) 236.354,25.407 27.534,25.407 cw(c27.534,27.534) 25.407,27.534 25.407,151.264 cw(c27.552,151.264) 27.552,153.409 30.353,153.409